# EAGLE board Galga (EAGLE 9.6.2)
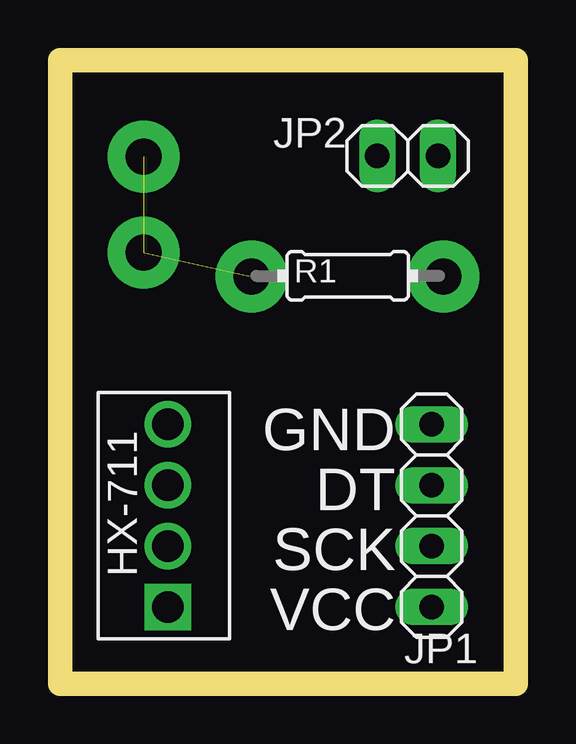
[diagram p0: board, top side]
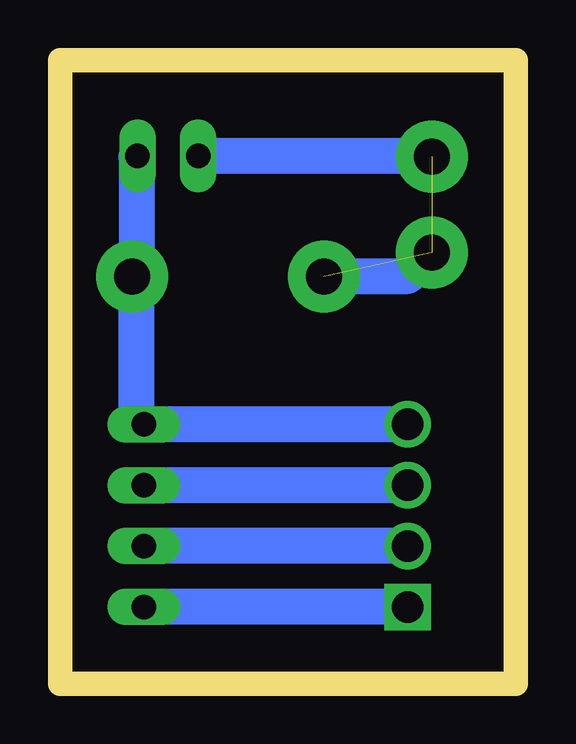
[diagram p1: board, bottom side, seen from below]

Size 19 x 26 mm. Coordinates in mm from the lower left corner, seen from the top.
Outline: 0,0 19,0 19,26 0,26 0,0
Copper layers (1*16): Top 0.035mm / dielectric 1.5mm / Bottom 0.035mm
Design rules "default": minimum track width 6mil, minimum drill 0.35mm, track to track 6mil, track to pad 6mil, pad to pad 6mil, via to via 6mil, smd to smd 6mil, copper to edge 40mil, drill to drill 6mil, minimum pad ring 10mil, minimum via ring 8mil, stop-mask expansion 4mil, vias tented up to drill 0mil, thermal gap 10mil

## Footprints (pad centres in the part's own frame; a part is rotated, then mirrored left to right if it is on the bottom)
1X04 = drill 1.016 long: 1 -3.81,0; 2 -1.27,0; 3 1.27,0; 4 3.81,0
1X02 = drill 1.016 long: 1 -1.27,0; 2 1.27,0
0204/7 = drill 0.813 octagon: 1 -3.81,0; 2 3.81,0
HX-711 = drill 1.3: DT 1.27,0; GND 3.81,0; SCK -1.27,0 | drill 1.3 square: VCC -3.81,0

## Placement (x,y rotation side)
JP1  [1X04]  15.5,7 270 top
JP2  [1X02]  14.5,22 0 top
R1  220  [0204/7]  12,17 180 top
U$2  HX-711  [HX-711]  4.5,7 90 top

## Library data of the parts
JP1 JP2 = pinhead
R1 = rcl; SPICEPREFIX: R
U$2 = MODULAR

## Nets
3V3: JP1.4 U$2.VCC
DT-GALGA: JP1.2 U$2.DT
GND: JP1.1 JP2.2 R1.1 U$2.GND
N$8: R1.2
PULSO-GALGA: JP2.1
SCK-GALGA: JP1.3 U$2.SCK

## Tracks (layer width: path | path; a pad name or v marks a point on that pad's centre or on a via)
3V3
  Bottom 1.5: U$2.VCC JP1.4
DT-GALGA
  Bottom 1.5: U$2.DT JP1.2
GND
  Bottom 1.5: U$2.GND JP1.1 15.81,11.12 R1.1 15.81,21.96 JP2.2
N$4  (via drill 1.5 pad 3)
  other vias: 15.98,16.96
N$8
  Bottom 1.5: R1.2 4.5,17 3.5,18
PULSO-GALGA  (via drill 1.5 pad 3)  (2 unrouted)
  Bottom 1.5: v3.48,21.96 3.52,22 JP2.1
  other vias: 7.98,16.96 3.48,17.96
SCK-GALGA
  Bottom 1.5: U$2.SCK JP1.3

## Text on the board
tPlace: GND | DT | SCK | VCC